# Altium PCB CURRENT_MEASURE_AC.PcbDoc
Units mil, origin at the board's own origin, x right, y up, seen from the top; angles counter-clockwise.
Board outline 935 x 925 mil, 2 copper layers (Top Layer, Bottom Layer); 18 components, 13 nets, 64 pads, 0 vias.
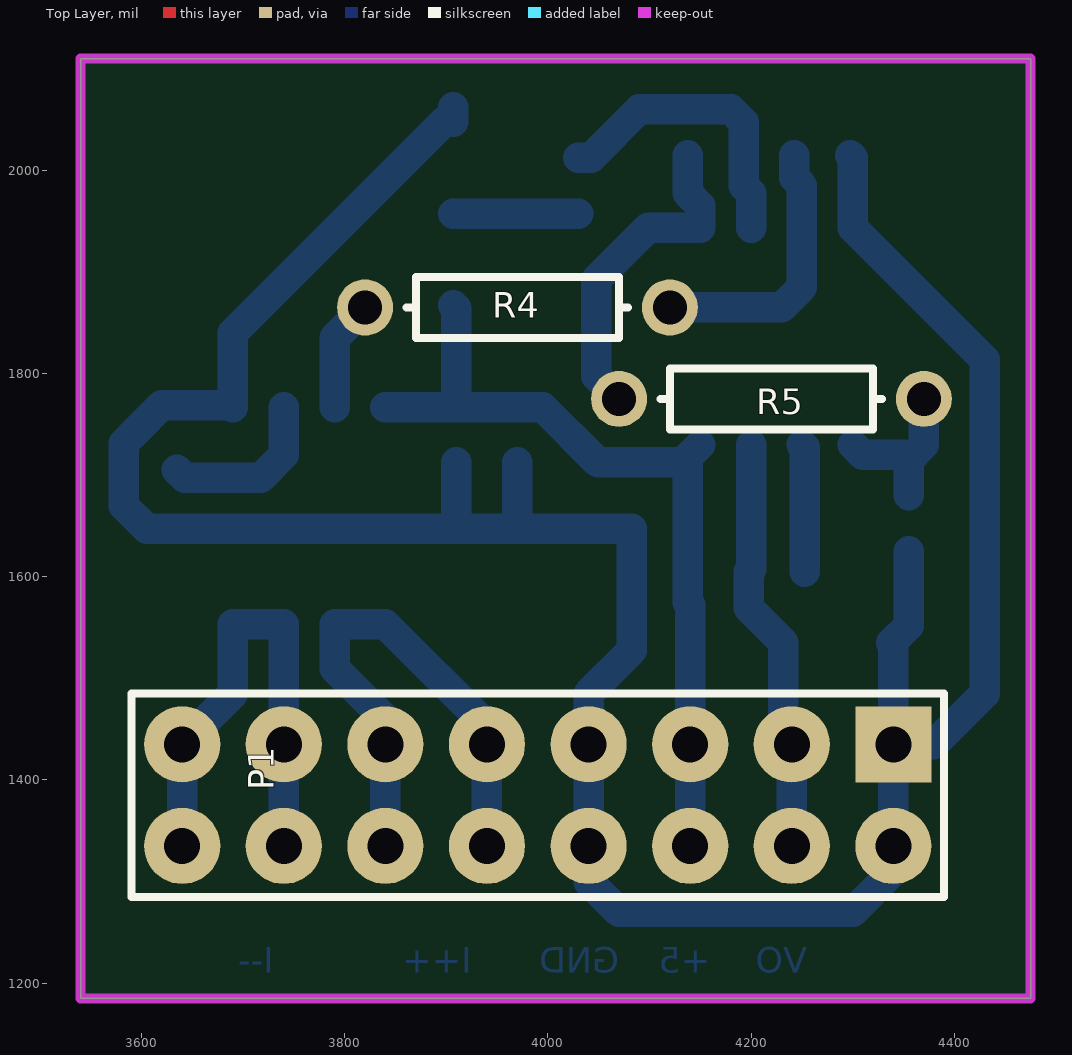
[diagram p0: Top Layer view]
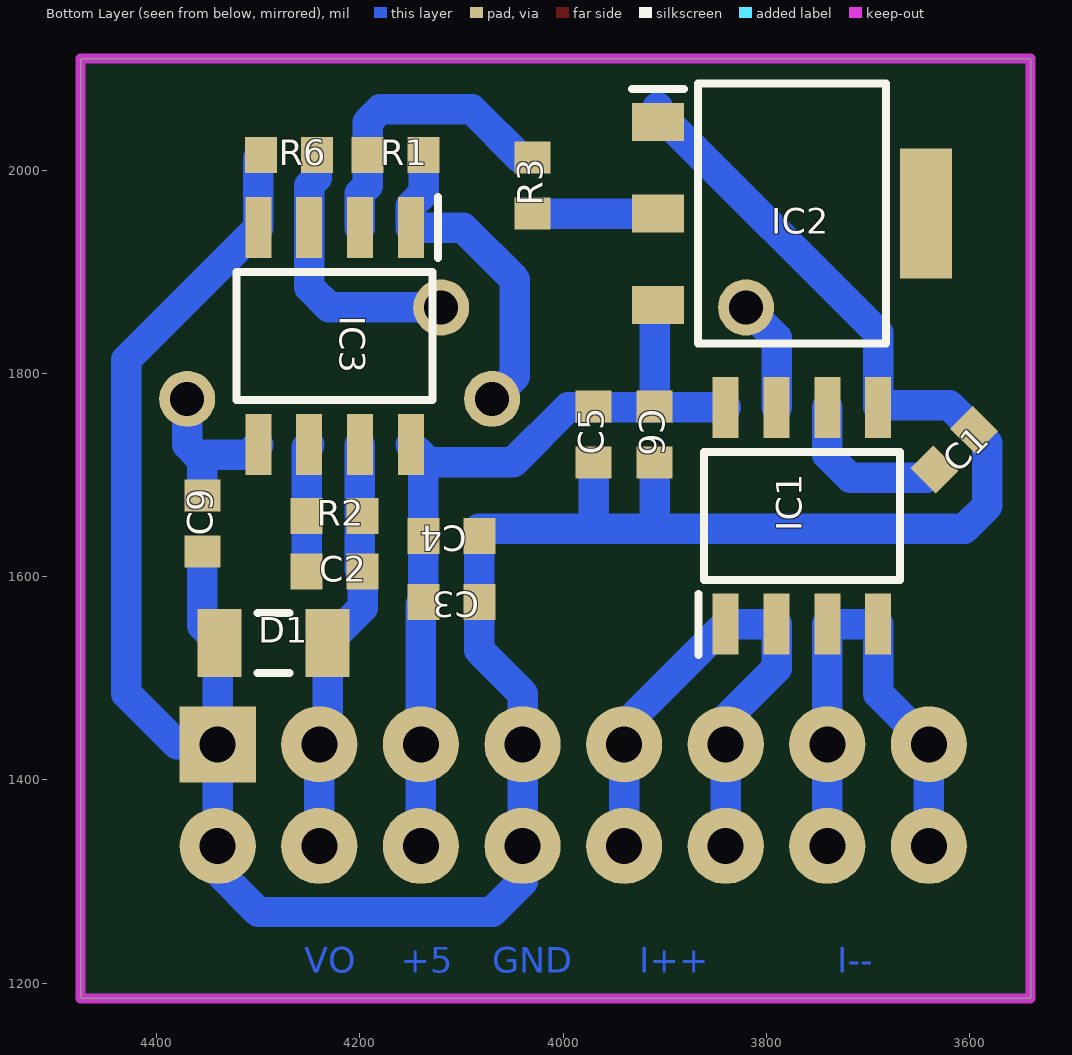
[diagram p1: Bottom Layer view, seen from below]

## Layer stack, top to bottom
Top Solder: solder mask 0.4, Solder Resist, Dk 3.5
Top Layer: signal copper 1.4
Dielectric 1: dielectric 12.6, FR-4, Dk 4.8
Bottom Layer: signal copper 1.4
Bottom Solder: solder mask 0.4, Solder Resist, Dk 3.5

## Board outline
4475,1185 3540,1185 3540,2110 4475,2110

## Design rules (kind name [scope] priority, off if disabled: settings)
Clearance [All] p1: gap=5 ignorepadtopadclearanceinfootprint=FALSE except(0: Arc-Hole Track-Hole SMDPad-Hole THPad-Hole Via-Hole Fill-Hole Poly-Hole Region-Hole Text-Hole; 10: Arc-Text Track-Text SMDPad-Text THPad-Text Via-Text Fill-Text Poly-Text Region-Text Text-Text)
PolygonConnect [All] p1: connectstyle=Relief reliefconductorwidth=10 reliefentries=4 polygonreliefangle="90 Angle" airgapwidth=10
RoutingVias [All] p1: holewidth=28 width=50 viastyle="Through Hole" minholewidth=28 minwidth=50 maxholewidth=28 maxwidth=50
SolderMaskExpansion [All] p1: expansion=4
Width [All] p1: maxlimit=30 minlimit=10 preferedwidth=30 minimp=50.000000 maximp=50.000000 favimp=50.000000
30 further rules are at their usual default settings.

## Components (designator, comment, footprint, x,y, rotation, side; value= is the part's Value field where it differs from the comment)
C1 "Cap" 1608[0603] 3615,1725 r135 bottom value=0.1uF
C2 "Cap" 1608[0603] 4225,1605 r180 bottom value=120nF
C3 "Cap" 1608[0603] 4110,1575 r0 bottom value=10uF
C4 "Cap" 1608[0603] 4110,1640 r0 bottom value=10uF
C5 "Cap" 1608[0603] 3970,1740 r90 bottom value=10uF
C6 "Cap" 1608[0603] 3910,1740 r270 bottom value=10nF
C9 "Cap" 1608[0603] 4355,1652.56 r90 bottom value=0.1uF
D1 "D Zener" C1206 4285,1535 r180 bottom
IC1 "ACS712ELCTR-05B-T" SOIC127P600X175-8N 3765,1660 r90 bottom
IC2 "ams1117-1.8v" SOT229P700X180-4N 3775,1957.44 r180 bottom
IC3 "OPA2188AID" SOIC127P600X175-8N 4225,1836.77 r270 bottom
P1 "Header 8X2A" HDR2X8_CEN 4340,1435 r180 top
R1 "Res2" 1608[0603] 4165,2015 r180 bottom value=27k
R2 "Res2" 1608[0603] 4225,1660 r180 bottom value=10k
R3 "Res2" 1608[0603] 4030,1985 r90 bottom value=10k
R4 "Res2" AXIAL-0.3 3970,1865 r0 top value=10k
R5 "Res2" AXIAL-0.3 4220,1775 r0 top value=10k
R6 "Res2" 1608[0603] 4270,2015 r180 bottom value=27k

## Footprints (in the part's own frame and the unit in brackets; to place one, negate y for a bottom-side part, rotate by r counter-clockwise, add the part's x,y. Pads: shape width x height; smd on the part's side, far side on the other; paste and mask are expansions set on the pad)
1608[0603] [mm] "Chip Capacitor, Body 1.6x0.8mm, IPC High Density"
  rect 0.8x0.9 smd: 1(-0.7,0) 2(0.7,0)
  body extent -0.87,-0.48 0.87,0.48, height 1.3
AXIAL-0.3 [mm] "Axial Device, Thru-Hole; 2 Leads; 0.3 in Pin Spacing"
  round 1.4 hole 0.85: 1(-3.81,0) 2(3.81,0)
  silkscreen extent -2.77,-0.76 2.77,0.76
C1206 [mm] "Chip Capacitor, Body 3.2x1.6mm, IPC High Density"
  rect 1.1x1.7 smd: 1(-1.35,0) 2(1.35,0)
  silkscreen extent -0.4,-0.75 0.4,0.75, body extent -1.7,-0.9 1.7,0.9, height 1.3
HDR2X8_CEN [mm] "Connector; Header; 8x2 Position"
  rect 1.905x1.905 hole 0.9: 1(0,0)
  round 1.905 hole 0.9: 2(2.54,0) 3(5.08,0) 4(7.62,0) 5(10.16,0) 6(12.7,0) 7(15.24,0) 8(17.78,0) 9(0,2.54) 10(2.54,2.54) 11(5.08,2.54) 12(7.62,2.54) 13(10.16,2.54) 14(12.7,2.54) 15(15.24,2.54) 16(17.78,2.54)
  silkscreen extent -1.27,-1.27 19.05,3.81
SOIC127P600X175-8N [mm]
  rect 1.525x0.65 smd: 1(-2.712,1.905) 2(-2.712,0.635) 3(-2.712,-0.635) 4(-2.712,-1.905) 5(2.712,-1.905) 6(2.712,-0.635) 7(2.712,0.635) 8(2.712,1.905)
  silkscreen extent -3.47,-2.45 1.6,2.58, body extent -3,-2.45 3,2.45, height 1.75
SOT229P700X180-4N [mm]
  rect 1.3x0.95 smd: 1(-3.35,2.29) 2(-3.35,0) 3(-3.35,-2.29)
  rect 1.3x3.25 smd: 4(3.35,0)
  silkscreen extent -4,-3.25 2.35,3.25

## Part data
C1 C2 C3 C4 C5 C6 C9: "Capacitor", LatestRevisionDate=17-Jul-2002, LatestRevisionNote="Re-released for DXP Platform.", PackageDescription="Radial Cap, Thru-Hole; 2 Leads; 0.3 in Pin Spacing", PackageReference=RAD-0.3, Published=8-Jun-2000, Publisher="Altium Limited"
D1: "Zener Diode", LatestRevisionDate=17-Jul-2002, LatestRevisionNote="Re-released for DXP Platform.", PackageDescription="Diode, Thru-Hole; 2 Leads; 0.7 in Pin Spacing", PackageReference=DIODE-0.7, Published=8-Jun-2000, Publisher="Altium Limited"
IC1: "Integrated Circuit", Manufacturer_Name="Allegro Microsystems", RS Part Number=1729270, Allied_Number=R1076681, Allied Price/Stock=http://www.alliedelec.com/allegro-microsystems-acs712elctr-05b-t/R1076681/, Datasheet Link=http://docs-emea.rs-online.com/webdocs/0d88/0900766b80d885f5.pdf, Height=1.75mm, Manufacturer_Part_Number=ACS712ELCTR-05B-T, RS Price/Stock=http://uk.rs-online.com/web/p/products/1729270
IC2: library part ams1117-3.3v, "Integrated Circuit", Manufacturer_Name="Advanced Monolithic Systems", Datasheet Link=http://www.advanced-monolithic.com/pdf/ds1117.pdf, Height=1.8mm, Manufacturer_Part_Number=ams1117-3.3v
IC3: "Integrated Circuit", Manufacturer_Name="Texas Instruments", Mouser Part Number=595-OPA2188AID, RS Part Number=9212845, Datasheet Link=http://www.ti.com/lit/ds/symlink/opa2188.pdf, Height=1.75mm, Manufacturer_Part_Number=OPA2188AID, Mouser Price/Stock=https://www.mouser.com/Search/Refine.aspx?Keyword=595-OPA2188AID, RS Price/Stock=https://uk.rs-online.com/web/p/products/9212845
P1: "Header, 8-Pin, Dual row", LatestRevisionDate=17-Jul-2002, LatestRevisionNote="Re-released for DXP Platform.", Publisher="Altium Limited"
R1 R2 R3 R4 R5 R6: "Resistor", LatestRevisionDate=17-Jul-2002, LatestRevisionNote="Re-released for DXP Platform.", PackageDescription="Axial Device, Thru-Hole; 2 Leads; 0.4 in Pin Spacing", PackageReference=AXIAL-0.4, Published=8-Jun-2000, Publisher="Altium Limited"

## Nets (pads, with @x,y where several pads share a name; then routed paths per layer and width w, separated by ;. In a path a pad name is that pad's centre, name@x,y a point inside that pad or via, vN(x,y) a via of type N, cw(c..) or ccw(c..) an arc to the next point about the centre after c; other vN are vias at no path point)
1+: IC3.3 R4.2 R6.2 | length 271.4
  Bottom Layer w30: R4.2 4230,1865 4250,1885 IC3.3 4250,1985 4242.44,1992.56 R6.2
1-: IC3.2 R1.1 R3.2 | length 294.4
  Bottom Layer w30: R3.2 4042.56,2012.56 4090,2060 4112.5,2060 4180,2060 4192.56,2047.44 R1.1 4192.56,1985 4200,1977.56 IC3.2
2+: C9.2 IC3.5 R5.2 | length 162.4
  Bottom Layer w30: IC3.5 4310.12,1719.88 4350,1719.88 4355,1714.88 ; C9.2 4355,1714.88 ; R5.2 4370,1729.88 4355,1714.88
2-: C2.1 IC3.6 R2.1 | length 126.1
  Bottom Layer w30: IC3.6 4252.56,1727.44 R2.1 C2.1
+5: C3.2 C4.2 C5.2 C6.1 IC1.8 IC2.3 IC3.8 P1.3 P1.11 | length 824.4
  Bottom Layer w30: IC1.8 3995,1766.77 4049.33,1712.44 4132.44,1712.44 IC3.8@4137.56,1717.56 ; IC2.3 3910,1864.17 C6.1 ; P1.11 P1.3 4140,1572.56 C3.2 C4.2 IC3.8@4137.56,1717.56 ; IC3.8 IC3.8@4137.56,1717.56
GND: C1.2 C3.1 C4.1 C5.1 C6.2 C9.1 D1.1 IC1.5 IC2.1 IC3.4 P1.1 P1.4 P1.9 P1.12 R6.1 | length 2931.7
  Bottom Layer w30: IC2.1@3906.89,2061.89 IC2.1 3897.6,2047.6 3690,1840 IC1.5 3687.8,1768.97 3620,1768.97 C1.2 3582.44,1731.42 3582.44,1670 3605,1647.44 3915,1647.44 ; C6.2 3910,1652.44 3915,1647.44 ; C5.1 3970,1652.44 3965,1647.44 ; R6.1 4300,2012.56 IC3.4 4430,1813.54 4430,1485 4380,1435 P1.1 ; C9.1 4355,1551.85 D1.1 4340,1533.15 P1.1 ; 3915,1647.44 3965,1647.44 ; 3965,1647.44 4082.44,1647.44 C4.1 C3.1 4082.44,1527.44 4040,1485 P1.4 P1.12 4040,1300 4070,1270 4300,1270 4340,1310 P1.9 P1.1
I+: IC1.1 IC1.2 P1.5 P1.6 P1.13 P1.14 | length 548.6
  Bottom Layer w30: P1.14 P1.6 3840,1460 3790,1510 IC1.2 IC1.1 3940,1453.23 P1.5 P1.13
I-: IC1.3 IC1.4 P1.7 P1.8 P1.15 P1.16 | length 507.2
  Bottom Layer w30: P1.16 P1.8 3690,1485 IC1.4 IC1.3 P1.7 P1.15
NetC1_1: C1.1 IC1.6 | length 164.9
  Bottom Layer w30: C1.1 3642.44,1697.56 3717.56,1697.56 3740,1720 IC1.6
Vo1: IC3.1 R1.2 R5.1 | length 327.1
  Bottom Layer w30: R5.1 4047.5,1797.5 4047.5,1892.5 4098.54,1943.54 IC3.1 4150,1965.12 4137.44,1977.68 R1.2
Vo_1.8V: IC2.2 R3.1 | length 123.1
  Bottom Layer w30: IC2.2 R3.1
Vo_ACS: IC1.7 R4.1 | length 110.7
  Bottom Layer w30: IC1.7 3790,1835 R4.1
Vout: C2.2 D1.2 IC3.7 P1.2 P1.10 R2.2 | length 413.7
  Bottom Layer w30: IC3.7 4200,1607.56 C2.2 4197.44,1569.41 D1.2 4231.85,1443.15 P1.2 P1.10
pads on no net: IC2.4

## Keep-outs
Keep-Out Layer:
  lines w10: 3540,1185 4430,1185 4475,1185 4475,2110 4424.26,2110 3540,2110 3540,1185

## Other copper
Bottom Layer:
  text "I--" at 3730,1210 h25
  text "I++" at 3925,1210 h25
  text "GND" at 4070,1210 h25
  text "+5" at 4160,1210 h25
  text "VO" at 4255,1210 h25